# Altium PCB PCB1.PcbDoc
Units mm, origin at the board's own origin, x right, y up, seen from the top; angles counter-clockwise.
Board outline 64.77 x 94.74 mm, 2 copper layers (Top Layer, Bottom Layer); 33 components, 110 nets, 266 pads, 0 vias.
Unrouted connection lines stored in the file: 140.
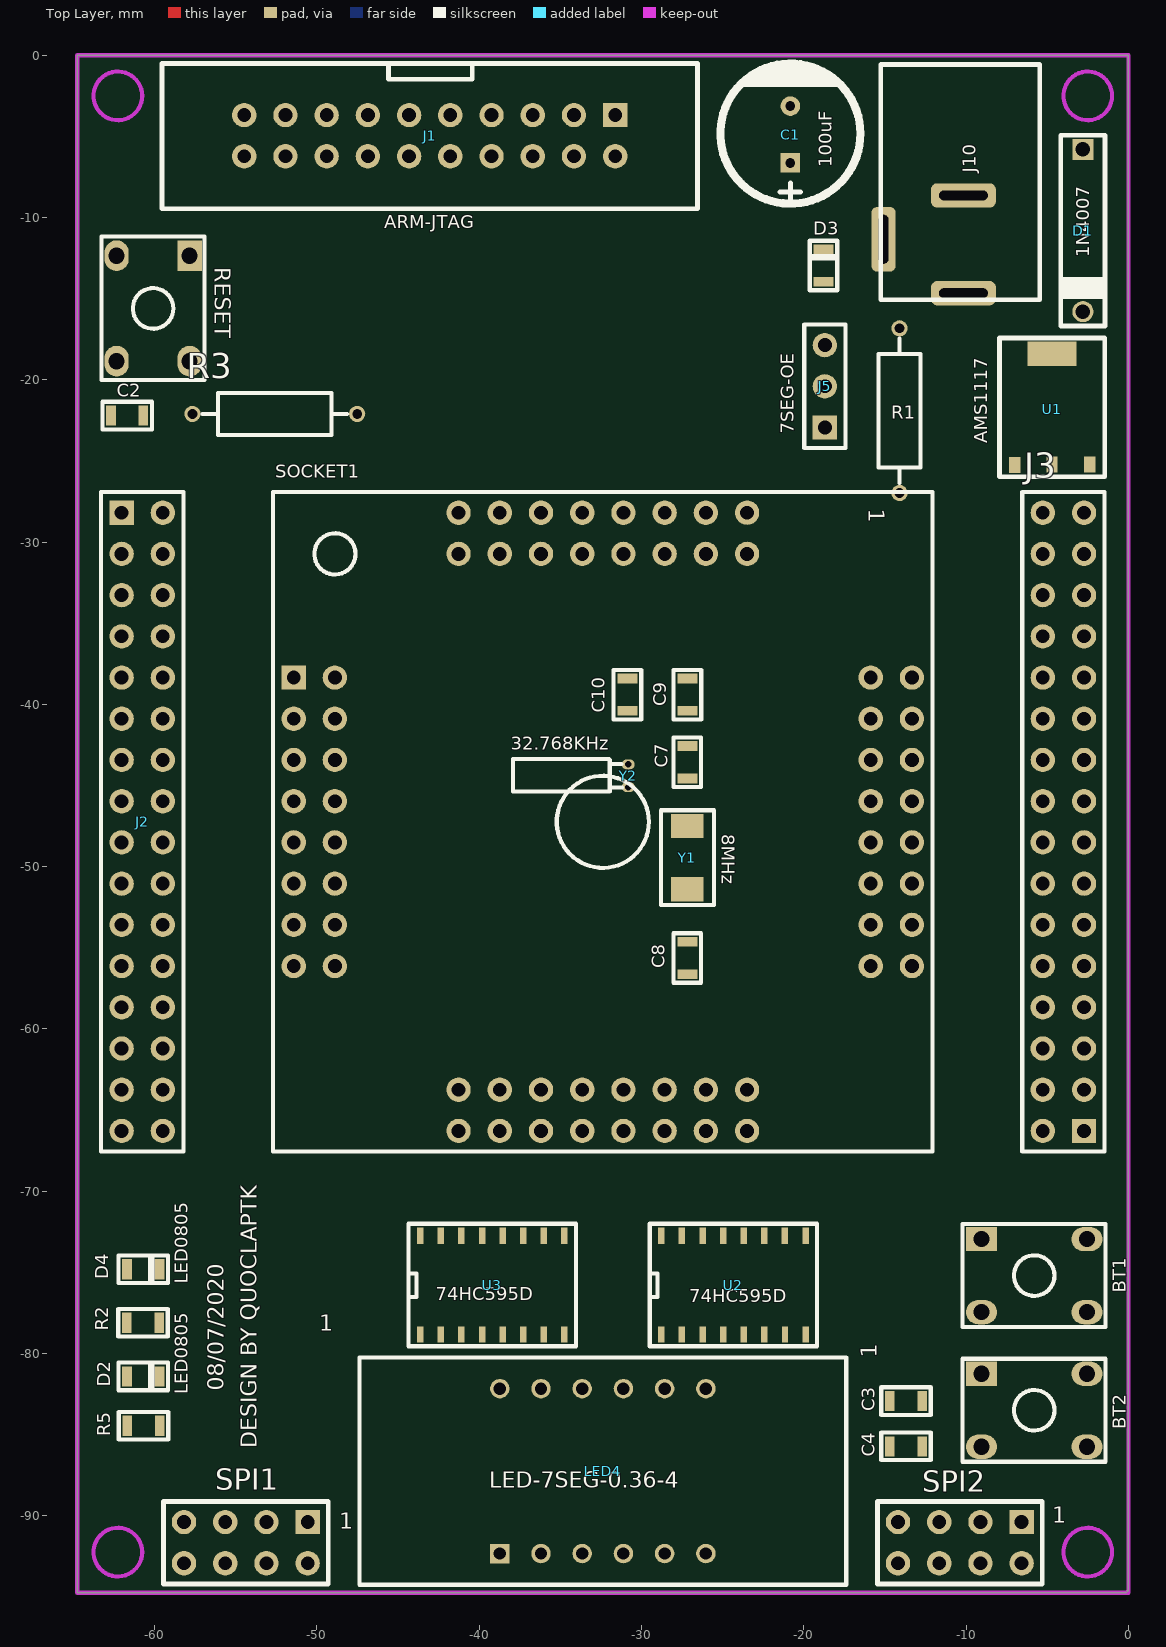
[diagram p0: Top Layer view]
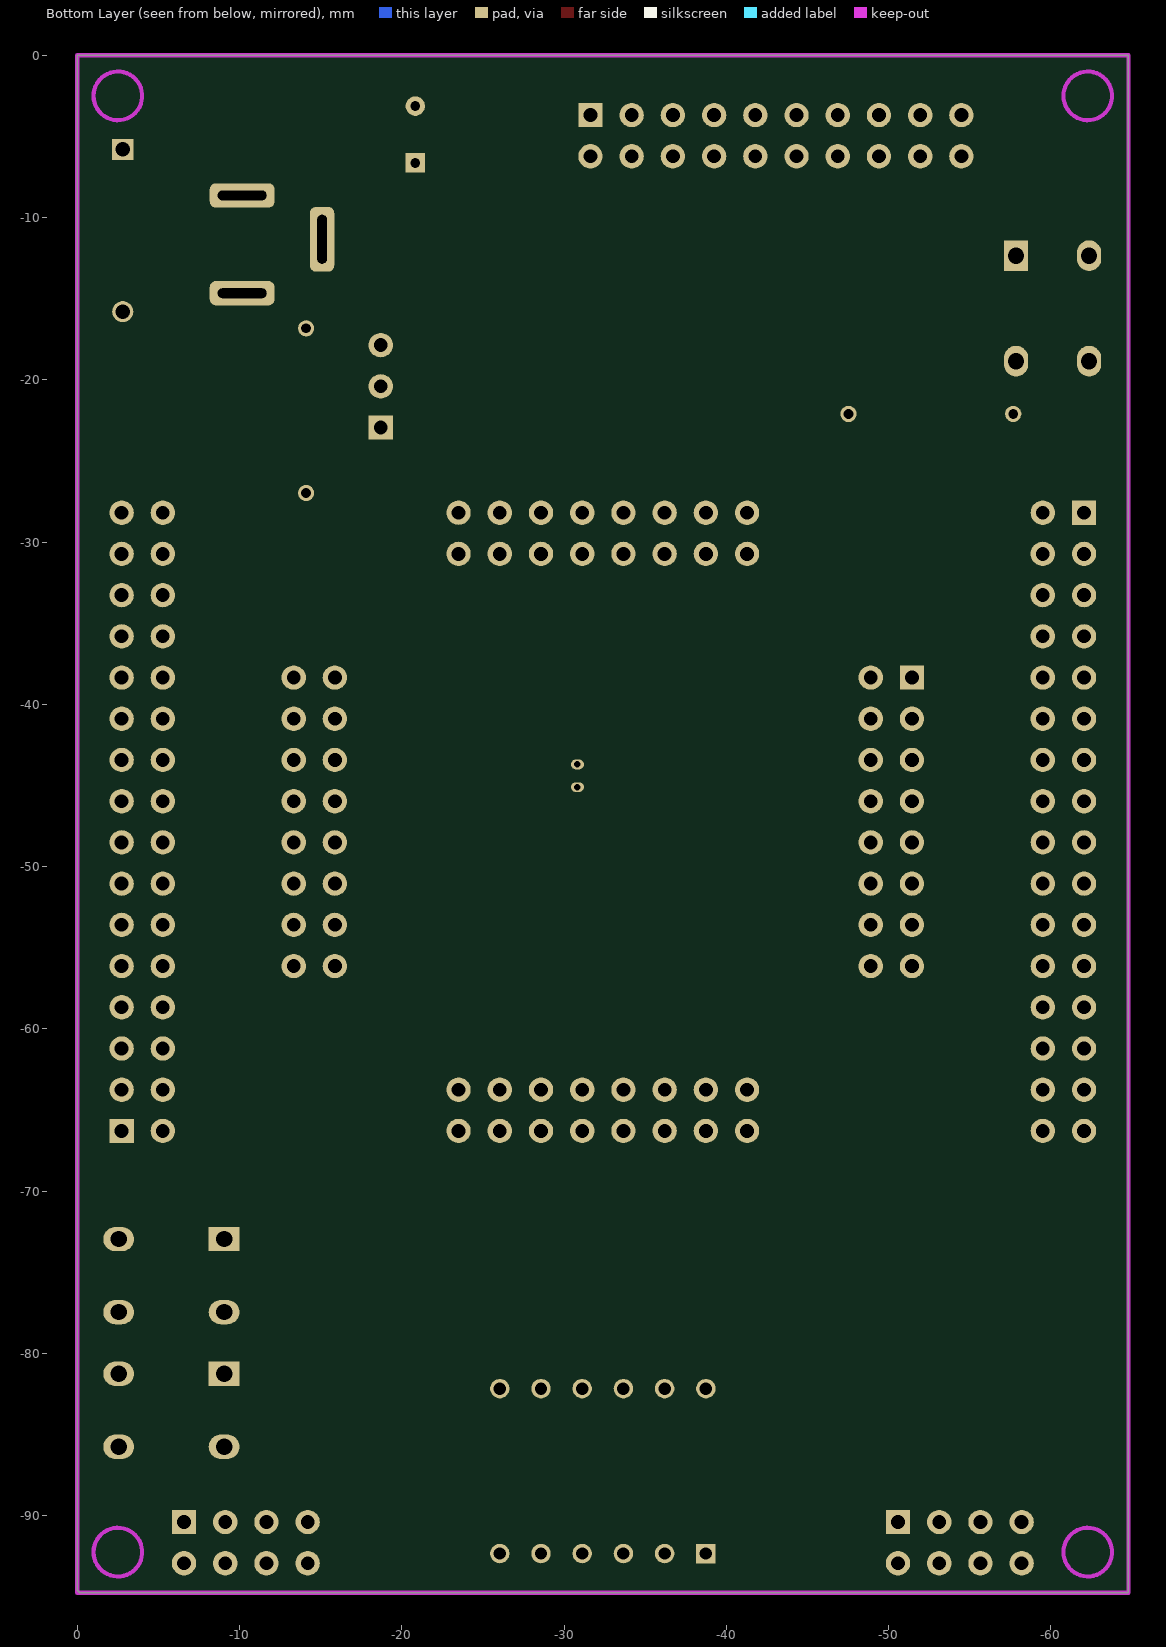
[diagram p1: Bottom Layer view, seen from below]

## Layer stack, top to bottom
Top Solder: solder mask 0.0102, Solder Resist, Dk 3.5
Top Layer: signal copper 0.0356
Dielectric 1: dielectric 0.32, FR-4, Dk 4.8
Bottom Layer: signal copper 0.0356
Bottom Solder: solder mask 0.0102, Solder Resist, Dk 3.5

## Board outline
-64.77,-94.742 -0.149,-94.742 0,-94.593 0,0 -64.77,0

## Design rules (kind name [scope] priority, off if disabled: settings)
Clearance [All] p1: gap=0.2 ignorepadtopadclearanceinfootprint=FALSE
PolygonConnect [All] p1: connectstyle=Relief reliefconductorwidth=0.254 reliefentries=4 polygonreliefangle="90 Angle" airgapwidth=0.254
RoutingVias [All] p1: holewidth=0.3 width=0.5 viastyle="Through Hole" minholewidth=0.3 minwidth=0.5 maxholewidth=0.3 maxwidth=0.5
SolderMaskExpansion [All] p1: expansion=0.102
Width [All] p1: maxlimit=3 minlimit=0.254 preferedwidth=0.254
30 further rules are at their usual default settings.

## Components (designator, comment, footprint, x,y, rotation, side; value= is the part's Value field where it differs from the comment)
BT1 "Button Hole" BUTTON_HOLE_5.0mm -5.8,-75.2 r90 top
BT2 "Button Hole" BUTTON_HOLE_5.0mm -5.8,-83.5 r90 top
C1 "100uF" CAP_RAD_7mm -20.828,-4.826 r90 top
C2 "103" C0805 -61.7,-22.2 r180 top
C3 "103" C0805 -13.7,-82.931 r0 top
C4 "103" C0805 -13.7,-85.725 r180 top
C7 "22pF" C0805 -27.178,-43.561 r90 top
C8 "22pF" C0805 -27.178,-55.626 r270 top
C9 "22pF" C0805 -27.17,-39.4 r90 top
C10 "22pF" C0805 -30.87,-39.4 r90 top
D1 "1N4007" DO-41 -2.8,-10.8 r270 top
D2 "LED0805" L0805RED -60.706,-82.042 r0 top
D3 "LED0805" L0805RED -18.161,-12.954 r90 top
D4 "LED0805" L0805RED -60.706,-75.438 r0 top
J1 "ARM-JTAG" IDC_CONNECTOR_20_2.54 -43.053,-4.953 r270 top
J2 "Header 16x2 TH Pitch 2.54mm" "Header 16x2 TH Pitch 2.54mm" -60.77,-47.236 r0 top
J3 "Header 16x2 TH Pitch 2.54mm" "Header 16x2 TH Pitch 2.54mm" -4,-47.236 r180 top
J5 "7SEG-OE" "Header 3x1 TH Pitch 2.54mm" -18.7,-20.4 r90 top
J10 "Connector" DC_K375A_Power -23.16,-7.361 r180 top
LED4 "LED-7SEG-0.36-4" LED-7SEG-0.36-4 -32.385,-87.249 r0 top
R1 "330" RES-0.25W-H-MF -14.1,-21.9 r270 top
R2 "330" R0805 -59.722,-78.105 r0 top
R3 "10K" RES-0.25W-H-MF -52.6,-22.1 r180 top
R5 "330" R0805 -59.69,-84.455 r0 top
RESET "Button Hole" BUTTON_HOLE_5.0mm -60.1,-15.6 r0 top
SOCKET1 "SOCKET-ENPLAS-OTQ-64-0.5-03" SOCKET-ADAPTER-OTQ-64-05-03 -32.385,-47.236 r0 top
SPI1 "Header 4x2 TH Pitch 2.54mm" "Header 4x2 TH Pitch 2.54mm" -54.385,-91.657 r270 top
SPI2 "Header 4x2 TH Pitch 2.54mm" "Header 4x2 TH Pitch 2.54mm" -10.385,-91.657 r270 top
U1 "AMS1117" SOT223-3 -4.7,-21.775 r0 top
U2 "74HC595D" SO16 -24.638,-75.692 r90 top
U3 "74HC595D" SO16 -39.497,-75.692 r90 top
Y1 "8MHz" SMD5032 -27.178,-47.498 r90 top
Y2 "32.768KHz" DT-26 -30.67,-44.4 r0 top

## Footprints (in the part's own frame and the unit in brackets; to place one, negate y for a bottom-side part, rotate by r counter-clockwise, add the part's x,y. Pads: shape width x height; smd on the part's side, far side on the other; paste and mask are expansions set on the pad)
BUTTON_HOLE_5.0mm [mm]
  rect 1.5x1.9 hole 1: 1(2.25,3.25)
  oval 1.5x1.9 hole 1: 2(2.25,-3.25) 3(-2.25,3.25) 4(-2.25,-3.25)
  silkscreen extent -3.18,-4.4 3.17,4.43, body extent -3,-3.86 3,3.86, height 5
C0805 [mm]
  rect 0.6x1.24 smd: 1(-1,0) 2(1,0)
  silkscreen extent -1.52,-0.85 1.53,0.85, body extent -1,-0.6 1,0.6, height 1
CAP_RAD_7mm [mm]
  rect 1.2x1.2 hole 0.6: 1(-1.805,0)
  round 1.2 hole 0.6: 2(1.695,0)
  silkscreen extent -4.32,-4.32 4.32,4.31, body extent -4.06,-4 3.94,4, height 11.33
DC_K375A_Power [mm]
  rrect50% 4x1.5 hole 0.6 slot 3 at 0 deg: 1(-13,7.3) 2(-13,1.275)
  rrect50% 1.5x4 hole 0.6 slot 3 at 90 deg: 3(-8.075,3.975)
  silkscreen extent -17.7,-6.8 -7.9,7.7, body extent -17.7,-6.8 -7.9,7.7, height 11
DO-41 [mm]
  rect 1.3x1.3 hole 0.9: 1(-5,0)
  round 1.3 hole 0.9: 2(5,0)
  silkscreen extent -5.88,-1.36 5.88,1.36, body extent -5.43,-1.36 5.43,1.36, height 3.36
DT-26 [mm]
  oval 0.8x0.6 hole 0.4: 1(-0.15,0.7) 2(-0.15,-0.7)
  silkscreen extent -7.24,-0.98 -0.54,1.02, body extent -7.14,-1 0,1, height 2
"Header 3x1 TH Pitch 2.54mm" [mm]
  rect 1.5x1.5 hole 0.85: 1(-2.54,0)
  round 1.5 hole 0.85: 2(0,0) 3(2.54,0)
  silkscreen extent -3.81,-1.27 3.81,1.27, body extent -3.81,-1.27 3.81,1.27, height 8.89
"Header 4x2 TH Pitch 2.54mm" [mm]
  rect 1.5x1.5 hole 0.85: 1(-1.27,3.81)
  round 1.5 hole 0.85: 2(1.27,3.81) 3(-1.27,1.27) 4(1.27,1.27) 5(-1.27,-1.27) 6(1.27,-1.27) 7(-1.27,-3.81) 8(1.27,-3.81)
  silkscreen extent -2.54,-5.08 2.54,5.08, body extent -2.54,-5.08 2.54,5.08, height 8.89
"Header 16x2 TH Pitch 2.54mm" [mm]
  rect 1.5x1.5 hole 0.85: 1(-1.27,19.05)
  round 1.5 hole 0.85: 2(1.27,19.05) 3(-1.27,16.51) 4(1.27,16.51) 5(-1.27,13.97) 6(1.27,13.97) 7(-1.27,11.43) 8(1.27,11.43) 9(-1.27,8.89) 10(1.27,8.89) 11(-1.27,6.35) 12(1.27,6.35) 13(-1.27,3.81) 14(1.27,3.81) 15(-1.27,1.27) 16(1.27,1.27) 17(-1.27,-1.27) 18(1.27,-1.27) 19(-1.27,-3.81) 20(1.27,-3.81) 21(-1.27,-6.35) 22(1.27,-6.35) 23(-1.27,-8.89) 24(1.27,-8.89) 25(-1.27,-11.43) 26(1.27,-11.43) 27(-1.27,-13.97) 28(1.27,-13.97) 29(-1.27,-16.51) 30(1.27,-16.51) 31(-1.27,-19.05) 32(1.27,-19.05)
  silkscreen extent -2.54,-20.32 2.54,20.32, body extent -2.54,-20.32 2.54,20.32, height 8.89
IDC_CONNECTOR_20_2.54 [mm]
  rect 1.5x1.5 hole 0.85: 1(-1.27,11.43)
  round 1.5 hole 0.85: 2(1.27,11.43) 3(-1.27,8.89) 4(1.27,8.89) 5(-1.27,6.35) 6(1.27,6.35) 7(-1.27,3.81) 8(1.27,3.81) 9(-1.27,1.27) 10(1.27,1.27) 11(-1.27,-1.27) 12(1.27,-1.27) 13(-1.27,-3.81) 14(1.27,-3.81) 15(-1.27,-6.35) 16(1.27,-6.35) 17(-1.27,-8.89) 18(1.27,-8.89) 19(-1.27,-11.43) 20(1.27,-11.43)
  silkscreen extent -4.45,-16.5 4.5,16.5, body extent -4.47,-16.6 4.42,16.6, height 9
L0805RED [mm]
  rect 0.6x1.24 smd: 1(-1,0.625) 2(1,0.625)
  silkscreen extent -1.53,-0.23 1.52,1.47, body extent -1,0 1,1.25, height 1.1
LED-7SEG-0.36-4 [mm]
  rect 1.2x1.2 hole 0.762: 1(-6.35,-5.08)
  round 1.2 hole 0.762: 2(-3.81,-5.08) 3(-1.27,-5.08) 4(1.27,-5.08) 5(3.81,-5.08) 6(6.35,-5.08) 7(6.35,5.08) 8(3.81,5.08) 9(1.27,5.08) 10(-1.27,5.08) 11(-3.81,5.08) 12(-6.35,5.08)
  silkscreen extent -15,-7 15,7
R0805 [mm]
  rect 0.6x1.24 smd: 1(-2,0) 2(0,0)
  silkscreen extent -2.53,-0.85 0.53,0.85, body extent -2,-0.62 0,0.62, height 0.45
RES-0.25W-H-MF [mm]
  round 1 hole 0.6: 1(-5.075,0) 2(5.075,0)
  silkscreen extent -4.45,-1.3 4.45,1.3, body extent -5.35,-1.3 5.36,1.3, height 2.69
SMD5032 [mm]
  rect 1.5x2 smd: 1(-3.9,0) 2(0,0)
  silkscreen extent -4.87,-1.65 0.97,1.63, body extent -4.45,-1.6 0.55,1.6, height 1.2
SO16 [mm]
  rect 1x0.4 smd: 1(-3.137,4.14) 2(-3.137,2.87) 3(-3.137,1.6) 4(-3.137,0.33) 5(-3.137,-0.94) 6(-3.137,-2.21) 7(-3.137,-3.48) 8(-3.137,-4.75) 9(2.948,-4.748) 10(2.948,-3.478) 11(2.948,-2.208) 12(2.948,-0.938) 13(2.948,0.332) 14(2.948,1.602) 15(2.948,2.872) 16(2.948,4.142)
  silkscreen extent -3.86,-5.46 3.68,4.85, body extent -3.17,-5.29 2.97,4.68, height 1.75
SOCKET-ADAPTER-OTQ-64-05-03 [mm]
  rect 1.5x1.5 hole 0.85: 1(-19.05,8.89)
  round 1.5 hole 0.85: 2(-16.51,8.89) 3(-19.05,6.35) 4(-16.51,6.35) 5(-19.05,3.81) 6(-16.51,3.81) 7(-19.05,1.27) 8(-16.51,1.27) 9(-19.05,-1.27) 10(-16.51,-1.27) 11(-19.05,-3.81) 12(-16.51,-3.81) 13(-19.05,-6.35) 14(-16.51,-6.35) 15(-19.05,-8.89) 16(-16.51,-8.89) 17(-8.89,-19.05) 18(-8.89,-16.51) 19(-6.35,-19.05) 20(-6.35,-16.51) 21(-3.81,-19.05) 22(-3.81,-16.51) 23(-1.27,-19.05) 24(-1.27,-16.51) 25(1.27,-19.05) 26(1.27,-16.51) 27(3.81,-19.05) 28(3.81,-16.51) 29(6.35,-19.05) 30(6.35,-16.51) 31(8.89,-19.05) 32(8.89,-16.51) 33(19.05,-8.89) 34(16.51,-8.89) 35(19.05,-6.35) 36(16.51,-6.35) 37(19.05,-3.81) 38(16.51,-3.81) 39(19.05,-1.27) 40(16.51,-1.27) 41(19.05,1.27) 42(16.51,1.27) 43(19.05,3.81) 44(16.51,3.81) 45(19.05,6.35) 46(16.51,6.35) 47(19.05,8.89) 48(16.51,8.89) 49(8.89,19.05) 50(8.89,16.51) 51(6.35,19.05) 52(6.35,16.51) 53(3.81,19.05) 54(3.81,16.51) 55(1.27,19.05) 56(1.27,16.51) 57(-1.27,19.05) 58(-1.27,16.51) 59(-3.81,19.05) 60(-3.81,16.51) 61(-6.35,19.05) 62(-6.35,16.51) 63(-8.89,19.05) 64(-8.89,16.51)
  silkscreen extent -20.32,-20.32 20.32,20.32, body extent -20.32,-20.32 20.32,20.32, height 9.5
SOT223-3 [mm]
  rect 0.7x1 smd: 1(-2.3,-3.475) 2(0,-3.45) 3(2.325,-3.45)
  rect 3x1.5 smd: 4(0,3.375)
  silkscreen extent -3.25,-4.2 3.25,4.35, body extent -3.25,-3.5 3.25,3.5, height 1.7

## Part data
C1: library part Capacitor(Radian)
C2 C3 C4 C7 C8 C9 C10: library part C0805
J1: library part IDC_2.54_10x2
J5: library part "Header 3x1 TH Pitch 2.54mm"
J10: library part JackDC
R1 R3: library part "Resistors THD"
R2 R5: library part "Resistor SMD"
SOCKET1: library part S32K118-SOCKET-ENPLAS-OTQ-64-0.5-03
U1: library part AMS1117(SOT-223)
Y1: library part Crystal
Y2: library part "Crystal 32.768KHz"

## Nets (pads, with @x,y where several pads share a name; then routed paths per layer and width w, separated by ;. In a path a pad name is that pad's centre, name@x,y a point inside that pad or via, vN(x,y) a via of type N, cw(c..) or ccw(c..) an arc to the next point about the centre after c; other vN are vias at no path point)
CPU_RESET_B: C2.2 R3.2 RESET.4
EXTAL: C8.1 Y1.1
GND: BT1.3 BT2.3 C1.2 C2.1 C3.2 C4.2 C7.2 C8.2 C9.2 C10.2 D2.2 D4.2 J1.4 J1.6 J1.8 J1.10 J1.12 J1.14 J1.16 J1.18 J1.20 J3.27 J3.29 J3.31 J5.1 J10.2 R1.2 RESET.2 SOCKET1.10 SOCKET1.40 SPI1.1 SPI2.1 U1.1 U2.8 U3.8
JNRST: J1.3
JTCK: J1.9
JTDI: J1.5
JTDO: J1.13
JTMS: J1.7
MCU_VDD: SOCKET1.7 SOCKET1.41
MCU_VDDA: SOCKET1.8
MCU_VREFH: SOCKET1.9
NetC1_1: C1.1 D1.2 U1.3
NetD1_1: D1.1 J10.1
NetD2_1: D2.1 R5.1
NetD3_2: D3.2 R1.1
NetD4_1: D4.1 R2.1
NetJ5_2: J5.2 U2.13 U3.13
NetLED4_1: LED4.1 U3.4
NetLED4_2: LED4.2 U3.3
NetLED4_3: LED4.3 U3.7
NetLED4_4: LED4.4 U3.2
NetLED4_5: LED4.5 U3.6
NetLED4_6: LED4.6 U2.7
NetLED4_7: LED4.7 U3.1
NetLED4_8: LED4.8 U2.6
NetLED4_9: LED4.9 U2.5
NetLED4_10: LED4.10 U3.5
NetLED4_11: LED4.11 U3.15
NetLED4_12: LED4.12 U2.4
NetU2_9: U2.9 U3.14
PB0: SPI1.3
PB1: SPI1.4
PB2: SPI1.8
PB3: U2.11 U3.11
PB5: U2.14
PB10: BT2.1 C4.1
PB11: BT1.1 C3.1
PC0: R5.2 SPI2.3
PC1: R2.2 SPI2.4
PC2: SPI2.8
PC14: C9.1 Y2.2
PC15: C10.1 Y2.1
PD2: U2.12 U3.12
PTA0: J2.1 SOCKET1.50
PTA1: J2.2 SOCKET1.49
PTA2: J2.3 SOCKET1.48
PTA3: J2.4 SOCKET1.47
PTA4: J2.5 SOCKET1.64
PTA5: J2.6 SOCKET1.63
PTA6: J2.7 SOCKET1.38
PTA7: J2.8 SOCKET1.37
PTA10: J2.9 SOCKET1.58
PTA11: J2.10 SOCKET1.57
PTA12: J2.11 SOCKET1.56
PTA13: J2.12 SOCKET1.55
PTB0: J2.13 SOCKET1.34
PTB1: J2.14 SOCKET1.33
PTB2: J2.15 SOCKET1.32
PTB3: J2.16 SOCKET1.31
PTB4: J2.17 SOCKET1.19
PTB5: J2.18 SOCKET1.18
PTB6: J2.19 SOCKET1.12
PTB7: J2.20 SOCKET1.11
PTB12: J2.21 SOCKET1.43
PTB13: J2.22 SOCKET1.42
PTC0: J2.23 SOCKET1.26
PTC1: J2.24 SOCKET1.25
PTC2: J2.25 SOCKET1.21
PTC3: J2.26 SOCKET1.20
PTC4: J2.27 SOCKET1.62
PTC5: J2.28 SOCKET1.61
PTC6: J2.29 SOCKET1.52
PTC7: J2.30 SOCKET1.51
PTC8: J2.31 SOCKET1.36
PTC9: J2.32 SOCKET1.35
PTC14: J3.1 SOCKET1.30
PTC15: J3.2 SOCKET1.29
PTC16: J3.3 SOCKET1.28
PTC17: J3.4 SOCKET1.27
PTD0: J3.5 SOCKET1.2
PTD1: J3.6 SOCKET1.1
PTD2: J3.7 SOCKET1.46
PTD3: J3.8 SOCKET1.45
PTD4: J3.9 SOCKET1.44
PTD5: J3.10 SOCKET1.24
PTD6: J3.11 SOCKET1.23
PTD7: J3.12 SOCKET1.22
PTD15: J3.13 SOCKET1.15
PTD16: J3.14 SOCKET1.14
PTE0: J3.15 SOCKET1.60
PTE1: J3.16 SOCKET1.59
PTE2: J3.17 SOCKET1.54
PTE3: J3.18 SOCKET1.13
PTE4: J3.19 SOCKET1.6
PTE5: J3.20 SOCKET1.5
PTE6: J3.21 SOCKET1.53
PTE7: J3.22 SOCKET1.39
PTE8: J3.23 SOCKET1.17
PTE9: J3.24 SOCKET1.16
PTE10: J3.25 SOCKET1.4
PTE11: J3.26 SOCKET1.3
RESET: J1.15
SPI1-MISO: SPI1.7
SPI1-MOSI: SPI1.6
SPI1-SCK: SPI1.5
SPI2-MISO: SPI2.7
SPI2-MOSI: SPI2.6
SPI2-SCK: SPI2.5
VCC: D3.1 J1.1 J1.2 J3.28 J3.30 J3.32 J5.3 R3.1 SPI1.2 SPI2.2 U1.2 U2.10 U2.16 U3.10 U3.16
XTAL: C7.1 Y1.2
pads on no net: BT1.2 BT1.4 BT2.2 BT2.4 J1.11 J1.17 J1.19 J10.3 RESET.1 RESET.3 U1.4 U2.1 U2.2 U2.3 U2.15 U3.9

## Keep-outs
Keep-Out Layer:
  circle w0.254: c-2.5,-92.242 r1.5
  circle w0.254: c-62.27,-92.242 r1.5
  circle w0.254: c-62.27,-2.5 r1.5
  circle w0.254: c-2.5,-2.5 r1.5
  lines w0.254: -64.77,-94.742 -64.77,0 0,0 0,-94.742 -64.77,-94.742

## Silkscreen, mask and mechanical layers (free items; w line width, h text height)
Top Overlay:
  text "1" at -16.002,-27.94 h1 r270
  text "1" at -49.87,-78.6 h1
  text "1" at -15.494,-80.264 h1 r90
  text "08/07/2020" at -55.753,-82.296 h1 r90
  text "DESIGN BY QUOCLAPTK" at -53.721,-85.852 h1 r90
  text "1" at -4.699,-90.424 h1
  text "1" at -48.641,-90.805 h1